# Altium PCB DE-260124.PcbDoc
Units mil, origin at the board's own origin, x right, y up, seen from the top; angles counter-clockwise.
Board outline 1771.65 x 2755.91 mil, 2 copper layers (Top Layer, Bottom Layer); 118 components, 96 nets, 356 pads, 98 vias.
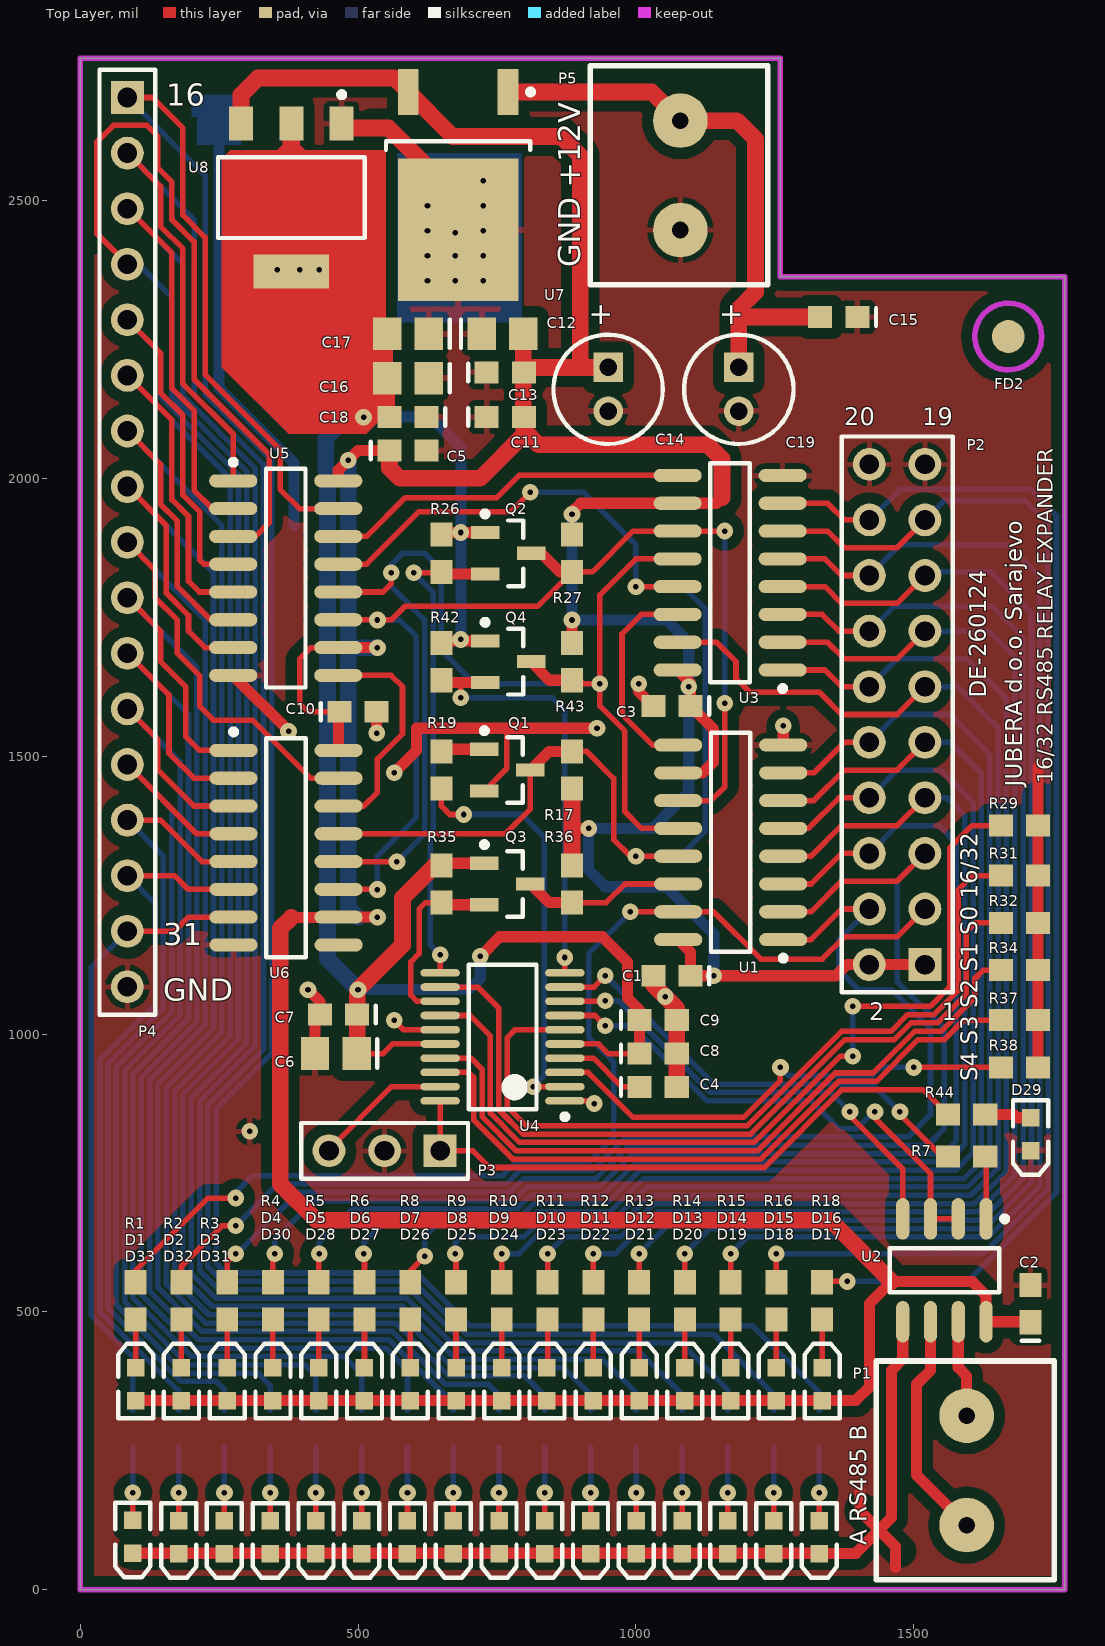
[diagram p0: Top Layer view]
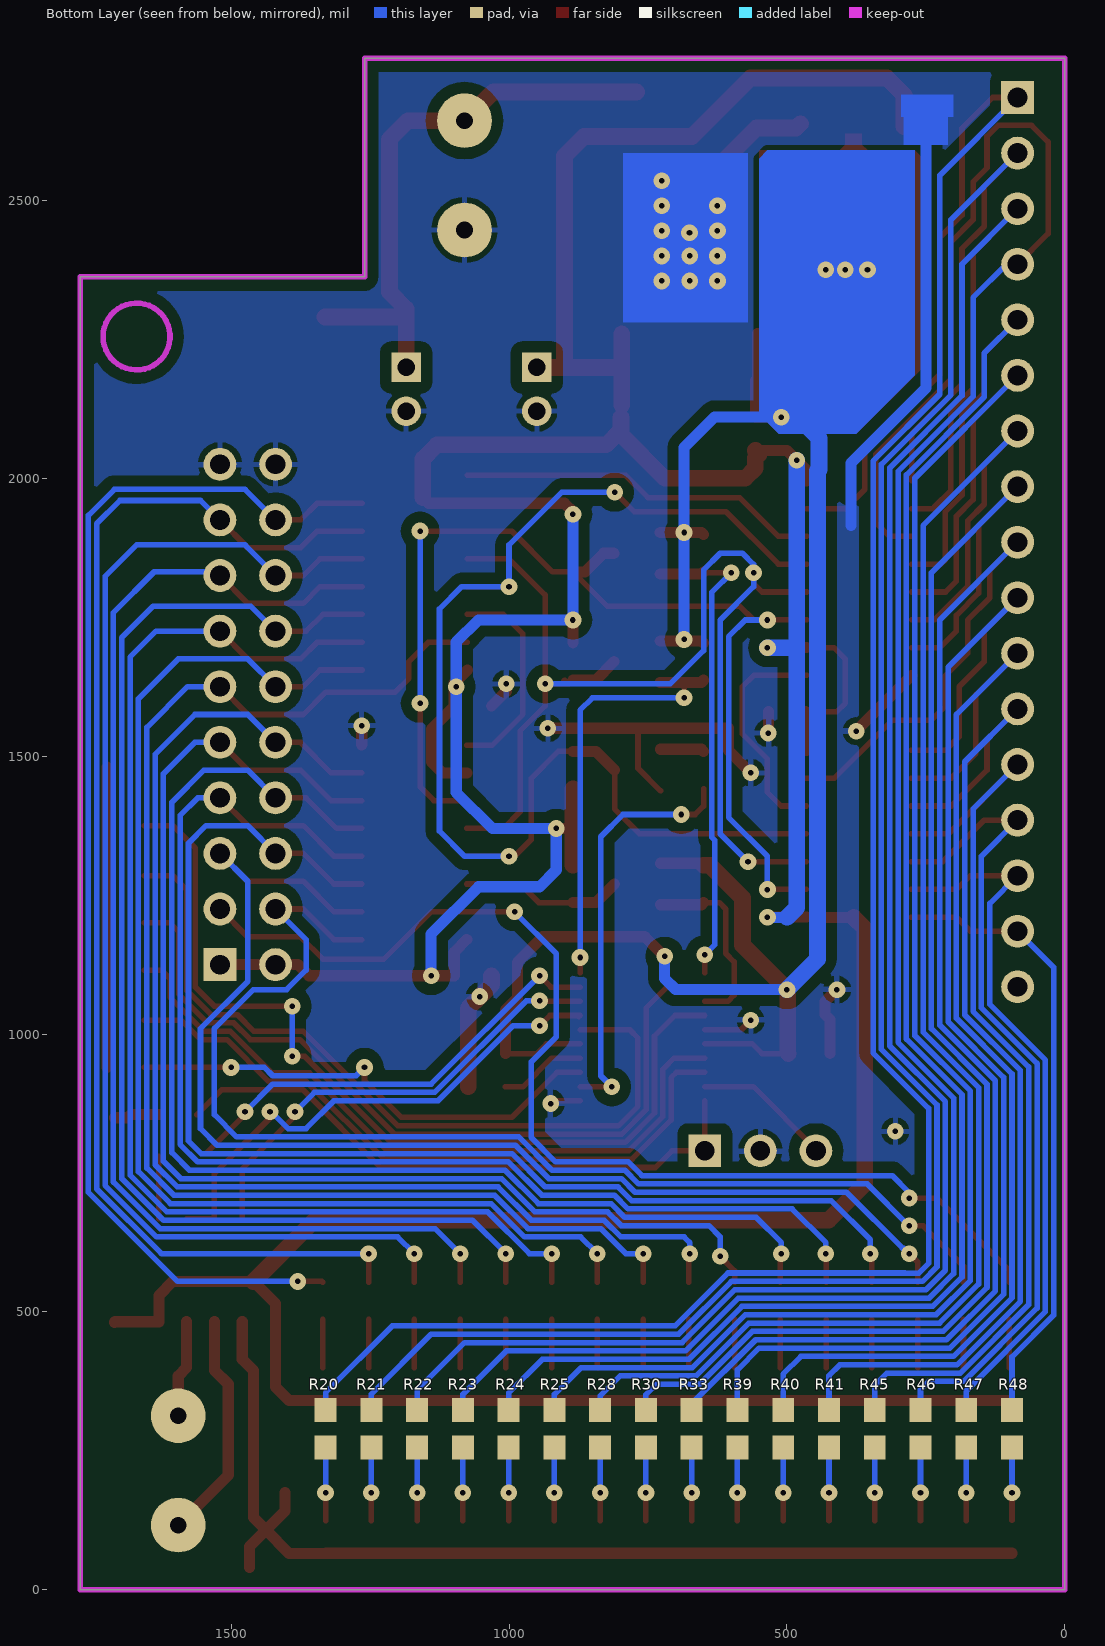
[diagram p1: Bottom Layer view, seen from below]

## Layer stack, top to bottom
Top Solder: solder mask 0.4, Solder Resist, Dk 3.5
Top Layer: signal copper 1.4
Dielectric 1: dielectric 12.6, FR-4, Dk 4.8
Bottom Layer: signal copper 1.4
Bottom Solder: solder mask 0.4, Solder Resist, Dk 3.5

## Board outline
0,0 0,2755.91 1259.84,2755.91 1259.84,2362.2 1771.65,2362.2 1771.65,0

## Design rules (kind name [scope] priority, off if disabled: settings)
Clearance [All] p1: gap=10 ignorepadtopadclearanceinfootprint=FALSE except(0: Arc-Hole Track-Hole SMDPad-Hole THPad-Hole Via-Hole Fill-Hole Poly-Hole Region-Hole Text-Hole; 5: Track-Track; 8: Arc-Track; 20: Arc-Poly Track-Poly SMDPad-Poly THPad-Poly Via-Poly Fill-Poly Poly-Poly)
PolygonConnect [All] p1: connectstyle=Relief reliefconductorwidth=10 reliefentries=4 polygonreliefangle="90 Angle" airgapwidth=10
RoutingVias [All] p1: holewidth=28 width=50 viastyle="Through Hole" minholewidth=10 minwidth=30 maxholewidth=28 maxwidth=50
SolderMaskExpansion [All] p1: expansion=4
Width [All] p1: maxlimit=157.48 minlimit=10 preferedwidth=30
30 further rules are at their usual default settings.

## Components (designator, comment, footprint, x,y, rotation, side; value= is the part's Value field where it differs from the comment)
C1 "100nF" 0603 1065,1105 r180 top
C2 "100nF" 0603 1710,515 r90 top
C3 "100nF" 0603 1065,1590 r180 top
C4 "100nF" 0603 1040,905 r0 top
C5 "100nF" 0603 590,2050 r0 top
C6 "4u7" 0805 460,965 r180 top
C7 "100nF" 0603 465,1035 r180 top
C8 "1uF" 0603 1040,965 r0 top
C9 "10nF" 0603 1040,1025 r0 top
C10 "100nF" 0603 500,1580 r0 top
C11 "100nF" 0603 765,2110 r0 top
C12 "10uF" 0805 760,2260 r0 top
C13 "100nF" 0603 765,2190 r0 top
C14 "22uF" CAPPR2-5X11 950,2160 r270 top value=47uF
C15 "100nF" 0603 1365,2290 r180 top
C16 "10uF" 0805 590,2180 r180 top
C17 "10uF" 0805 590,2260 r180 top
C18 "100nF" 0603 590,2110 r180 top
C19 "22uF" CAPPR2-5X11 1185,2160 r270 top value=47uF
D1 "LED_RED" 1.6X0.8X0.8 100,370 r90 top
D2 "LED_RED" 1.6X0.8X0.8 182.33,370 r90 top
D3 "LED_RED" 1.6X0.8X0.8 264.67,370 r90 top
D4 "LED_RED" 1.6X0.8X0.8 347,370 r90 top
D5 "LED_RED" 1.6X0.8X0.8 429.33,370 r90 top
D6 "LED_RED" 1.6X0.8X0.8 511.67,370 r90 top
D7 "LED_RED" 1.6X0.8X0.8 594,370 r90 top
D8 "LED_RED" 1.6X0.8X0.8 676.33,370 r90 top
D9 "LED_RED" 1.6X0.8X0.8 758.67,370 r90 top
D10 "LED_RED" 1.6X0.8X0.8 840,370 r90 top
D11 "LED_RED" 1.6X0.8X0.8 923.33,370 r90 top
D12 "LED_RED" 1.6X0.8X0.8 1005.67,370 r90 top
D13 "LED_RED" 1.6X0.8X0.8 1088,370 r90 top
D14 "LED_RED" 1.6X0.8X0.8 1170.33,370 r90 top
D15 "LED_RED" 1.6X0.8X0.8 1252.67,370 r90 top
D16 "LED_RED" 1.6X0.8X0.8 1335,370 r90 top
D17 "LED_RED" 1.6X0.8X0.8 1330,95 r270 top
D18 "LED_RED" 1.6X0.8X0.8 1247.67,95 r270 top
D19 "LED_RED" 1.6X0.8X0.8 1165.33,95 r270 top
D20 "LED_RED" 1.6X0.8X0.8 1083,95 r270 top
D21 "LED_RED" 1.6X0.8X0.8 1000.67,95 r270 top
D22 "LED_RED" 1.6X0.8X0.8 918.33,95 r270 top
D23 "LED_RED" 1.6X0.8X0.8 836,95 r270 top
D24 "LED_RED" 1.6X0.8X0.8 753.67,95 r270 top
D25 "LED_RED" 1.6X0.8X0.8 671.33,95 r270 top
D26 "LED_RED" 1.6X0.8X0.8 589,95 r270 top
D27 "LED_RED" 1.6X0.8X0.8 506.67,95 r270 top
D28 "LED_RED" 1.6X0.8X0.8 424.33,95 r270 top
D29 "LED_RED" 1.6X0.8X0.8 1710,820 r270 top
D30 "LED_RED" 1.6X0.8X0.8 342,95 r270 top
D31 "LED_RED" 1.6X0.8X0.8 259.67,95 r270 top
D32 "LED_RED" 1.6X0.8X0.8 177.33,95 r270 top
D33 "LED_RED" 1.6X0.8X0.8 95,95.47 r270 top
FD2 "Fiducial" Fiducial 1670,2255 r0 top
P1 "TERMINAL BLOK 2" "TERMINAL BLOK 2" 1595,215 r180 top
P2 "Header 10X2" HDR2X10 1520,1125 r90 top
P3 "ICSP" HDR1X3 647.8,790 r180 top
P4 "Header 17" HDR1X17 85,2685 r270 top
P5 "TERMINAL BLOK 2" "TERMINAL BLOK 2" 1080,2545 r180 top
Q1 "MMBT2222" SOT23_N 768.66,1475 r0 top
Q2 "BSS123" SOT23_N 770,1865 r0 top
Q3 "BSS123" SOT23_N 768.66,1270 r0 top
Q4 "BSS123" SOT23_N 770,1670 r0 top
R1 "3K3" ERA-0603 100,520 r90 top
R2 "3K3" ERA-0603 182.33,520 r90 top
R3 "3K3" ERA-0603 264.67,520 r90 top
R4 "3K3" ERA-0603 347,520 r90 top
R5 "3K3" ERA-0603 429.33,520 r90 top
R6 "3K3" ERA-0603 511.67,520 r90 top
R7 "1K" ERA-0603 1595,780 r0 top
R8 "3K3" ERA-0603 594,520 r90 top
R9 "3K3" ERA-0603 676.33,520 r90 top
R10 "3K3" ERA-0603 758.67,520 r90 top
R11 "3K3" ERA-0603 841,520 r90 top
R12 "3K3" ERA-0603 923.33,520 r90 top
R13 "3K3" ERA-0603 1005.67,520 r90 top
R14 "3K3" ERA-0603 1088,520 r90 top
R15 "3K3" ERA-0603 1170.33,520 r90 top
R16 "3K3" ERA-0603 1252.67,520 r90 top
R17 "10K" ERA-0603 885,1475 r90 top
R18 "3K3" ERA-0603 1335,520 r90 top
R19 "10K" ERA-0603 650,1475 r90 top
R20 "3K3" ERA-0603 1330,290 r270 bottom
R21 "3K3" ERA-0603 1247.67,290 r270 bottom
R22 "3K3" ERA-0603 1165.33,290 r270 bottom
R23 "3K3" ERA-0603 1083,290 r270 bottom
R24 "3K3" ERA-0603 1000.67,290 r270 bottom
R25 "3K3" ERA-0603 918.33,290 r270 bottom
R26 "10K" ERA-0603 650,1865 r270 top
R27 "10K" ERA-0603 885,1865 r270 top
R28 "3K3" ERA-0603 836,290 r270 bottom
R29 "NF" ERA-0603 1690,1375 r180 top
R30 "3K3" ERA-0603 753.67,290 r270 bottom
R31 "NF" ERA-0603 1690,1285 r180 top
R32 "NF" ERA-0603 1690,1200 r180 top
R33 "3K3" ERA-0603 671.33,290 r270 bottom
R34 "NF" ERA-0603 1690,1115 r180 top
R35 "10K" ERA-0603 650,1270 r270 top
R36 "10K" ERA-0603 885,1270 r270 top
R37 "NF" ERA-0603 1690,1025 r180 top
R38 "NF" ERA-0603 1690,940 r180 top
R39 "3K3" ERA-0603 589,290 r270 bottom
R40 "3K3" ERA-0603 506.67,290 r270 bottom
R41 "3K3" ERA-0603 424.33,290 r270 bottom
R42 "10K" ERA-0603 650,1670 r270 top
R43 "10K" ERA-0603 885,1670 r270 top
R44 "3K3" ERA-0603 1595,855 r0 top
R45 "3K3" ERA-0603 342,290 r270 bottom
R46 "3K3" ERA-0603 259.67,290 r270 bottom
R47 "3K3" ERA-0603 177.33,290 r270 bottom
R48 "3K3" ERA-0603 95,290 r270 bottom
U1 "SN74HC595D" D016_N 1170.51,1345 r180 top
U2 "MAX485" D008_L 1555,575 r270 top
U3 "SN74HC595D" D016_N 1169.49,1830 r180 top
U4 "STM32F030F4P6" STM-TSSOP20_N 760,995 r180 top
U5 "SN74HC595D" D016_N 370,1820.35 r0 top
U6 "SN74HC595D" D016_N 370.51,1335.35 r0 top
U7 "L78M05CDT-TR" TO-252_N 680.24,2527.68 r270 top
U8 "REG1117-3.3" ZZ311 380,2505 r180 top

## Footprints (in the part's own frame and the unit in brackets; to place one, negate y for a bottom-side part, rotate by r counter-clockwise, add the part's x,y. Pads: shape width x height; smd on the part's side, far side on the other; paste and mask are expansions set on the pad)
1.6X0.8X0.8 [mm] "SM LED; 2 Flat Leads"
  rect 0.8x0.8 smd: 1(-0.75,0) 2(0.75,0)
  silkscreen extent -1.55,-0.8 1.85,0.8
0603 [mm] "Chip Capacitor; Body 1.6 x 0.8 mm (LxW typ)"
  rect 1.1x1 smd: 1(-0.85,0) 2(0.85,0)
  silkscreen extent -1.7,-0.4 -1.7,0.4
0805 [mm] "Chip Capacitor; Body 2.0 x 1.2 mm (LxW typ)"
  rect 1.3x1.5 smd: 1(-0.95,0) 2(0.95,0)
  silkscreen extent -1.9,-0.65 -1.9,0.65
CAPPR2-5X11 [mm] "Capacitor, Electrolytic, Radial; Body 5 x 11 mm (Dia.xH typ); Pin Spacing 2 mm (typ)"
  rect 1.35x1.35 hole 0.8: 1(-1,0)
  round 1.35 hole 0.8: 2(1,0)
  silkscreen extent -2.5,-2.5 2.5,2.5
D008_L [mm] "SOIC, 8-Leads, Body 4.9x3.9mm, Pitch 1.27mm, IPC High Density"
  oval 1.9x0.6 smd: 1(-2.35,1.905) 2(-2.35,0.635) 3(-2.35,-0.635) 4(-2.35,-1.905) 5(2.35,-1.905) 6(2.35,-0.635) 7(2.35,0.635) 8(2.35,1.905)
  silkscreen extent -2.47,-2.5 1,2.88, body extent -2,-2.5 2,2.5, height 1.75
D016_N [mm] "SOIC, 16-Leads, Body 9.9x3.9mm, Pitch 1.27mm, IPC Medium Density"
  oval 2.2x0.6 smd: 1(-2.4,4.445) 2(-2.4,3.175) 3(-2.4,1.905) 4(-2.4,0.635) 5(-2.4,-0.635) 6(-2.4,-1.905) 7(-2.4,-3.175) 8(-2.4,-4.445) 9(2.4,-4.445) 10(2.4,-3.175) 11(2.4,-1.905) 12(2.4,-0.635) 13(2.4,0.635) 14(2.4,1.905) 15(2.4,3.175) 16(2.4,4.445)
  silkscreen extent -2.53,-5 0.9,5.42, body extent -1.95,-4.95 1.95,4.95, height 1.75
ERA-0603 [mm] "Chip Resistor; Body 1.6 x 0.8 mm (LxW typ)"
  rect 1.1x1 smd: 1(-0.85,0) 2(0.85,0)
Fiducial [mm] "Pick and place machine mark"
  round 1.5 smd paste+0 mask+0.8: 3(0,0)
  Keep-Out Layer circle w0.254: c0,0 r1.529
HDR1X3 [mm] "Connector; Header; 3 Position"
  rect 1.5x1.5 hole 0.9: 1(0,0)
  round 1.5 hole 0.9: 2(2.54,0) 3(5.08,0)
  silkscreen extent -1.27,-1.27 6.35,1.27
HDR1X17 [mm] "Connector; Header; 17 Position"
  rect 1.5x1.5 hole 0.9: 1(0,0)
  round 1.5 hole 0.9: 2(2.54,0) 3(5.08,0) 4(7.62,0) 5(10.16,0) 6(12.7,0) 7(15.24,0) 8(17.78,0) 9(20.32,0) 10(22.86,0) 11(25.4,0) 12(27.94,0) 13(30.48,0) 14(33.02,0) 15(35.56,0) 16(38.1,0) 17(40.64,0)
  silkscreen extent -1.27,-1.27 41.91,1.27
HDR2X10 [mm] "Connector; Header; 10x2 Position"
  rect 1.5x1.5 hole 0.9: 1(0,0)
  round 1.5 hole 0.9: 2(0,2.54) 3(2.54,0) 4(2.54,2.54) 5(5.08,0) 6(5.08,2.54) 7(7.62,0) 8(7.62,2.54) 9(10.16,0) 10(10.16,2.54) 11(12.7,0) 12(12.7,2.54) 13(15.24,0) 14(15.24,2.54) 15(17.78,0) 16(17.78,2.54) 17(20.32,0) 18(20.32,2.54) 19(22.86,0) 20(22.86,2.54)
  silkscreen extent -1.27,-1.27 24.13,3.81
SOT23_N [mm] "SOT23, 3-Leads, Body 2.9x1.3mm, Pitch 0.95mm, Lead Span 2.3mm, IPC Medium Density"
  rect 1.3x0.6 smd: 1(-1.05,0.95) 2(-1.05,-0.95) 3(1.05,0)
  silkscreen extent -1.17,-1.5 0.7,1.92, body extent -0.7,-1.5 0.7,1.5, height 1.1
STM-TSSOP20_N [mm] "SOP, 20-Leads, Body 6.6x4.5mm, Pitch 0.65mm, IPC Medium Density"
  oval 1.8x0.35 smd: 1(-2.85,2.925) 2(-2.85,2.275) 3(-2.85,1.625) 4(-2.85,0.975) 5(-2.85,0.325) 6(-2.85,-0.325) 7(-2.85,-0.975) 8(-2.85,-1.625) 9(-2.85,-2.275) 10(-2.85,-2.925) 11(2.85,-2.925) 12(2.85,-2.275) 13(2.85,-1.625) 14(2.85,-0.975) 15(2.85,-0.325) 16(2.85,0.325) 17(2.85,0.975) 18(2.85,1.625) 19(2.85,2.275) 20(2.85,2.925)
  silkscreen extent -2.98,-3.3 1.55,3.77, body extent -2.25,-3.3 2.25,3.3, height 1.2
"TERMINAL BLOK 2" [mm] "2 pinski terminal blok konektor"
  round 2.5 hole 0.762: 1(0,-2.5) 2(0,2.5)
  silkscreen extent -4,-5 4.13,5
TO-252_N [mm] "D-PAK, 4-Leads, Body 6.1x6.5mm, Pitch 2.28mm, Lead Span 9.7mm, IPC Medium Density"
  rect 2.1x0.95 smd: 1(-4.25,2.28) 3(-4.25,-2.28)
  rect 6.5x5.5 smd: 4(2.05,0)
  silkscreen extent -4.37,-3.3 -1.6,3.43, body extent -2,-3.3 4.2,3.3, height 2.4
ZZ311 [mm] "SOT-223/SC-73; 4 Leads; Body 6.7 x 7.3 mm, inc. leads (LxW max)"
  rect 1.1x1.55 smd: 1(-2.3,-3.375) 2(0,-3.375) 3(2.3,-3.375)
  rect 3.45x1.55 smd: 4(0,3.375)
  silkscreen extent -3.35,-4.82 3.35,1.85

## Part data
C1 C2 C3 C4 C5 C7 C8 C9 C10 C11 C13 C15 C18: library part C0603, "Ceramic Chip Capacitor - Standard", PackageDocument=Mar-2001, Code_IPC="1608 [0603]", Code_JEITA=0603, ComponentLink1Description="Manufacturer Link", ComponentLink1URL=http://www.kemet.com/, ComponentLink2Description=Datasheet, ComponentLink2URL=http://www.kemet.com/kemet/web/homepage/kechome.nsf/vapubfilesname/F3102TA.pdf/$file/F3102TA.pdf, DatasheetDocument=Mar-2001, LatestRevisionDate=19-Mar-2004, LatestRevisionNote="Silkscreen size reduced.", Note="Footprint corresponds to dimensions for bulk cassette packaging. This case size has tightened tolerances.", PackageReference=0603, Published=17-Jul-2002, Publisher="Altium Limited"
C6 C12 C16 C17: library part C0805, "Ceramic Chip Capacitor - Standard", PackageDocument=Mar-2001, Code_IPC=2012[0805], Code_JEITA=0805, ComponentLink1Description="Manufacturer Link", ComponentLink1URL=http://www.kemet.com/, ComponentLink2Description=Datasheet, ComponentLink2URL=http://www.kemet.com/kemet/web/homepage/kechome.nsf/vapubfilesname/F3102TA.pdf/$file/F3102TA.pdf, DatasheetDocument=Mar-2001, LatestRevisionDate=19-Mar-2004, LatestRevisionNote="Silkscreen size reduced.", Note="Footprint corresponds to dimensions for bulk cassette packaging. This case size has tightened tolerances.", PackageReference=0805, Published=17-Jul-2002, Publisher="Altium Limited"
C14 C19: library part EKA00AA247F00, "Aluminum Electrolytic Capacitor, Radial Style with Long Leads: 47uF, 35V", ComponentLink1Description="Manufacturer Link", ComponentLink1URL=http://www.vishay.com/, ComponentLink2Description=Datasheet, ComponentLink2URL=http://www.vishay.com/docs/25014/eka.pdf, DatasheetDocument=20-Feb-2001, DrillSize="Nominal, Rounded To The Nearest 0.1mm", Note="Refer to Manufacturer's Data Sheets for other lead formations", PackageReference=CAPPR2-5X11, Published=19-Mar-2004, Publisher="Altium Limited"
D1 D2 D3 D4 D5 D6 D7 D8 D9 D10 D11 D12 D13 D14 D15 D16 D17 D18 D19 D20 D21 D22 D23 D24 D25 D26 D27 D28 D29 D30 D31 D32 D33: library part HSMZ-C190, "High Performance Chip LED, Red", LED_Colour=Red, PackageDocument=11-Mar-2002, ComponentLink1Description="Manufacturer Link", ComponentLink1URL=http://www.agilent.com/, ComponentLink2Description=Datasheet, ComponentLink2URL=http://cp.literature.agilent.com/litweb/pdf/5988-5891EN.pdf, DatasheetDocument=11-Mar-2002, LuminousIntensity="40mcd (Minimum).", PackageReference=1.6X0.8X0.8, PCB_Layout="Complies with manufacturer's recommendation.", Published=11-Dec-2002, Publisher="Altium Limited"
FD2: library part Fiduchial, "Fiduchial mark"
P1 P5: "2 pinski terminal blok"
P2: "Header, 10-Pin, Dual row", LatestRevisionDate=17-Jul-2002, LatestRevisionNote="Re-released for DXP Platform.", Publisher="Altium Limited"
P3: library part "Header 3", "Header, 3-Pin", LatestRevisionDate=17-Jul-2002, LatestRevisionNote="Re-released for DXP Platform.", Publisher="Altium Limited"
P4: "Header, 17-Pin", LatestRevisionDate=17-Jul-2002, LatestRevisionNote="Re-released for DXP Platform.", Publisher="Altium Limited"
Q1: library part BC817, "NPN General-purpose Transistor", ComponentLink1Description="Manufacturer Link", ComponentLink1URL=http://www.semiconductors.philips.com/, ComponentLink2Description=Datasheet, ComponentLink2URL=http://www.semiconductors.philips.com/acrobat/datasheets/BC817_BC817W_BC337_5.pdf, DatasheetVersion=Jun-1999, LatestRevisionDate=12-Dec-2006, LatestRevisionNote="IPC-7351 Footprint Added.", PackageDescription="3-Pin SOT-23 Package 0.95 mm Pitch, 2.3 mm Lead Span", PackageReference=SOT23, PackageVersion=May-1999, Published=17-Sep-2003, Publisher="Altium Limited"
Q2 Q3 Q4: "N-channel Enhancement Mode Vertical D-MOSFET", ComponentLink1Description="Manufacturer Link", ComponentLink1URL=http://www.semiconductors.philips.com/, ComponentLink2Description=Datasheet, ComponentLink2URL=http://www.semiconductors.philips.com/acrobat/datasheets/BSS123_3.pdf, DatasheetVersion=Apr-1995, LatestRevisionDate=12-Dec-2006, LatestRevisionNote="IPC-7351 Footprint Added.", PackageDescription="3-Pin SOT-23 Package 0.95 mm Pitch, 2.3 mm Lead Span", PackageReference=SOT23, PackageVersion=May-1999, Published=17-Sep-2003, Publisher="Altium Limited"
R1 R2 R3 R4 R5 R6 R8 R9 R10 R11 R12 R13 R14 R15 R16 R18 R20 R21 R22 R23 R24 R25 R28 R30 R33 R39 R40 R41 R44 R45 R46 R47 R48: library part ERA3Y, "Rectangular Thick Film Chip Resistor, 10 Ohm to 330k Ohm Range, 0.1% and 0.5% Tolerance, 0603 Size, 0.063 W", PackageDocument=Mar-2003, Code_IPC="1608 [0603]", ComponentLink1Description="Manufacturer Link", ComponentLink1URL=http://www.panasonic.com/industrial/components/resistive_products.htm, ComponentLink2Description=Datasheet, ComponentLink2URL=http://www.panasonic.com/industrial/components/pdf/AOA0000CE8.pdf, LatestRevisionDate=19-Mar-2004, LatestRevisionNote="Silkscreen size reduced.", Note="If flow soldering, adjust pad width of PCB Footprint to 0.7 - 0.8 times the width of the resistor.", PackageReference=ERA-0603, Published=17-Dec-2003, Publisher="Altium Limited"
R7 R17 R19 R26 R27 R29 R31 R32 R34 R35 R36 R37 R38 R42 R43: library part ERA6Y, "Rectangular Thick Film Chip Resistor, 10 Ohm to 1M Ohm Range, 0.1% and 0.5% Tolerance, 0805 Size, 0.1 W", PackageDocument=Mar-2003, Code_IPC="2012 [0805]", ComponentLink1Description="Manufacturer Link", ComponentLink1URL=http://www.panasonic.com/industrial/components/resistive_products.htm, ComponentLink2Description=Datasheet, ComponentLink2URL=http://www.panasonic.com/industrial/components/pdf/AOA0000CE8.pdf, LatestRevisionDate=19-Mar-2004, LatestRevisionNote="Silkscreen size reduced.", Note="If flow soldering, adjust pad width of PCB Footprint to 0.7 - 0.8 times the width of the resistor.", PackageReference=ERA-0805, Published=17-Dec-2003, Publisher="Altium Limited"
U1 U3 U5 U6: "8-Bit Shift Register with 3-State Output Registers", Code_IPC=SOIC127P600-16, ComponentLink1Description="Manufacturer Link", ComponentLink1URL=http://www.ti.com/, ComponentLink2Description=Datasheet, ComponentLink2URL=http://www-s.ti.com/sc/ds/sn74hc595.pdf, DatasheetVersion=May-1997, LatestRevisionDate=13-Apr-2006, LatestRevisionNote="IPC-7351 Footprint Added.", PackageDescription="16-Pin Small Outline Integrated Circuit 1.27 mm Pitch", PackageReference=D016, PackageVersion=Jan-1998, Published=8-Jun-2000, Publisher="Altium Limited"
U2: library part SN75176BD, "Differential Bus Transceiver", Code_IPC=SOIC127P600-8, ComponentLink1Description="Manufacturer Link", ComponentLink1URL=http://www.ti.com/, ComponentLink2Description=Datasheet, ComponentLink2URL=http://www-s.ti.com/sc/ds/sn75176b.pdf, DatasheetVersion=Sep-1989, LatestRevisionDate=13-Apr-2006, LatestRevisionNote="IPC-7351 Footprint Added.", Note="Receiver Hysteresis of 50mV Typical", PackageDescription="8-Pin Small Outline Integrated Circuit 1.27 mm Pitch", PackageReference=D008, PackageVersion=Jan-1998, Published=15-May-2002, Publisher="Altium Limited"
U4: "ARM Cortex-M0 32-bit MCU, 16 KB Flash, 4 KB Internal RAM, 15 I/Os, 20-pin TSSOP, -40 to 85 degC, Tube", I/Os (High Current)=15, Operating Frequency(F) (Processor speed) (MHz)=48, Supplier Part Number 1=497-14044-5-ND, Supply Voltage(Vcc) min (V)=2.4, ComponentLink1Description="Manufacturer URL", ComponentLink1URL=http://www.st.com/web/en/home.html, ComponentLink2Description=Datasheet, ComponentLink2URL=http://www.st.com/st-web-ui/static/active/en/resource/technical/document/datasheet/DM00088500.pdf, ComponentLink3Description="Package Specification", ComponentLink3URL=http://www.st.com/st-web-ui/static/active/en/resource/technical/document/datasheet/DM00065136.pdf, Core="ARM Cortex-M0", DatasheetVersion="Rev. 1", FLASH Size (Prog) (kB)=16, Internal RAM Size (kB)=4, Mounting Technology="Surface Mount", PackageDescription="20-Pin Thin Shrink Small Outline Package, 6.5 x 4.4 mm Body, 0.65 mm Pitch", PackageReference=TSSOP20, PackageVersion="Rev. 1, 11/2012", Packing=Tube, PartNumber=STM32F030F4P6, Supplier 1=Digi-Key, Supplier 2=Newark, Supplier 3=Mouser, Supplier Part Number 2=06X3648, Supplier Part Number 3=511-STM32F030F4P6
U7: "Positive Voltage Regulator, 5V, 3-Pin DPAK, Tape and Reel", ComponentLink1Description="Manufacturer URL", ComponentLink1URL=http://www.st.com, ComponentLink2Description=Datasheet, ComponentLink2URL=http://www.st.com/internet/com/TECHNICAL_RESOURCES/TECHNICAL_LITERATURE/DATASHEET/CD00000447.pdf, DatasheetVersion=Nov-2010, PackageDescription="3-Pin Transistor Outline Package 2.28 mm Pitch, 9.7 mm Lead Span (DPAK)", PackageReference=TO-252, PackageVersion=2011, PartNumber=L78M05CDT-TR
U8: "800mA and 1A Low Dropout Positive Regulator 2.85V, 3.3V, 5V, and Adjustable", ComponentLink1Description="Manufacturer Link", ComponentLink1URL=http://www.ti.com/, ComponentLink2Description=Datasheet, ComponentLink2URL=http://www-s.ti.com/sc/ds/REG1117.pdf, DatasheetVersion=Sep-1997, LatestRevisionDate=17-Jul-2002, LatestRevisionNote="Re-released for DXP Platform.", PackageDescription="SOT-223/SC-73; 4 Leads; Body 6.7 x 7.3 mm, inc. leads (LxW max)", PackageReference=ZZ311, PackageVersion=revC, Published=8-Jun-2000, Publisher="Altium Limited"

## Via types
v1: diameter 30, hole 10, Top Layer to Bottom Layer, 98 vias

## Nets (pads, with @x,y where several pads share a name; then routed paths per layer and width w, separated by ;. In a path a pad name is that pad's centre, name@x,y a point inside that pad or via, vN(x,y) a via of type N, cw(c..) or ccw(c..) an arc to the next point about the centre after c; other vN are vias at no path point)
+3V3: C6.1 C7.1 C8.1 C9.1 C16.2 C17.2 C18.2 Q2.1 Q3.1 Q4.1 R26.1 R35.1 R42.1 U4.5 U4.16 U8.2 U8.4 | length 3527.8
  Top Layer w10: C6.1 545,965 562.2,982.2 U4.16 ; U4.5 932.8,982.2 950,965 C8.1
  Top Layer w20: v1(510,2110) C18.2 556.54,2176.06 C16.2 C17.2 ; R35.1 653.94,1307.4 Q3.1 ; R42.1 653.94,1707.4 Q4.1 ; R26.1 653.94,1902.4 v1(685,1902.4) Q2.1 ; v1(720,1140) 755,1175 940,1175 985,1130 985,1065 1006.54,1043.46 C9.1 C8.1
  Top Layer w30: C6.1 498.46,966.06 C7.1 498.46,1078.46 v1(500,1080) 580,1160 580,1245 638.46,1303.46 R35.1
  Bottom Layer w20: v1(500,1080) 700,1080 720,1100 v1(720,1140) ; v1(510,2110) 630,2110 685,2055 v1(685,1902.4) v1(685,1710)
  Bottom Layer w30: v1(500,1080) 445,1135 445,2012.92 442.24,2015.68 442.24,2072.24 480,2110 v1(510,2110)
  other v1: 355,2375 395,2375 430,2375
+5V: C1.1 C2.1 C3.1 C5.1 C10.1 C11.2 C12.2 C13.2 C14.1 D1.1 D2.1 D3.1 D4.1 D5.1 D6.1 D7.1 D8.1 D9.1 D10.1 D11.1 D12.1 D13.1 D14.1 D15.1 D16.1 P2.1 P2.2 R17.1 R27.1 R36.1 R43.1 U1.10 U1.16 U2.8 U3.10 U3.16 U5.10 U5.16 U6.10 U6.16 U7.3 U8.3 | length 9845.8
  Top Layer w10: U5.10 415.35,1695.35 395,1675 395,1595 410,1580 C10.1 ; v1@534.65,1695.35 v1(535,1695)
  Top Layer w20: D1.1 D2.1 D3.1 D4.1 D5.1 D6.1 D7.1 D8.1 D9.1 D10.1 D11.1 D12.1 D13.1 D14.1 D15.1 D16.1 1395.47,340.47 1420,365 1420,515 1460,555 1605,555 1630,530 U2.8 1709.06,482.48 C2.1 ; 380,1210 U6.10@450,1210 ; U5.10 v1@534.65,1695.35 ; U5.16 464.49,2014.49 v1(482.24,2032.24) 500,2050 C5.1 ; U6.10 534.65,1210.35 v1(535,1210) ; U6.16 465,1578.46 C10.1 ; C13.2 C13.2@807.83,2199.37 ; 885,1370 v1(915,1370) ; R43.1 v1(885,1745) ; v1(885,1935) 885,1940 900,1955 U3.10 1145,1955 1155,1965 ; U3.16 1098.46,1631.54 C3.1 1139.33,1549.13 1139.33,1489.33 1120,1470 U1.10 ; U1.16 1098.46,1147.56 C1.1 v1(1140,1105) 1360,1105 1380,1125 P2.2 P2.1
  Top Layer w30: U8.3@289.45,2632.87 U8.3 289.45,2689.45 320,2720 565.47,2720 U7.3 670.47,2615 865,2615 900,2580 900,2199.37 ; 380,1210 360,1190 360,730 425,665 1350,665 1460,555 ; C5.1 550,2043.46 556.73,2036.73 556.73,2018.27 575,2000 720,2000 798.46,2078.46 798.46,2086.54 ; 797.4,2131.06 C12.2 ; C11.2 798.46,2086.54 ; C13.2@807.83,2199.37 900,2199.37 ; R36.1 885,1370 R17.1 ; C14.1 900,2199.37 ; 1155,1965 1155,2035 1130,2060 825,2060 798.46,2086.54
  Bottom Layer w20: 500,1210 v1(535,1210) ; v1(885,1935) v1(885,1745) 1055,1745 1095,1705 v1(1095,1625) 1095,1435 1030,1370 v1(915,1370) 915,1295 945,1265 1055,1265 1140,1180 v1(1140,1105)
  Bottom Layer w30: v1(482.24,2032.24) 482.24,1695 ; 500,1210 482.24,1227.76 482.24,1695 ; v1(535,1695) 482.24,1695
HC595_DS: Q3.3 R36.2 U1.14 | length 293.7
  Top Layer w10: R36.2 946.54,1236.54 980,1270 U1.14
  Top Layer w20: Q3.3 843.46,1236.54 R36.2
HC595_OE: Q1.3 R17.2 U1.13 U3.13 U5.13 U6.13 | length 2314.7
  Top Layer w10: U5.13 515.35,1845.35 610,1940 775,1940 v1(810,1975) ; U6.13 765.35,1360.35 810,1405 Q1.3 ; R17.2 911.54,1508.46 960,1460 960,1350 990,1320 v1(1000,1320) U1.13 ; v1(1000,1805) U3.13
  Top Layer w20: Q1.3 843.46,1508.46 R17.2
  Bottom Layer w10: v1(810,1975) 905,1975 1000,1880 v1(1000,1805) 1085,1805 1125,1765 1125,1365 1080,1320 v1@1005,1320
HC595_SH: Q2.3 R27.2 U1.11 U3.11 U5.11 U6.11 | length 2035.3
  Top Layer w10: U5.11 560.35,1745.35 585,1770 823.46,1770 R27.2 921.54,1831.54 995,1905 U3.11 v1(1160,1905) ; U6.11 v1@530.35,1260.35 ; U1.11 1135,1420 1160,1445 v1(1160,1595)
  Top Layer w20: Q2.3 830,1865 863.46,1831.54 R27.2
  Bottom Layer w10: v1(535,1260) 535,1320 605,1390 605,1715 575,1745 v1(535,1745) ; v1(1160,1595) v1(1160,1905)
HC595_ST: Q4.3 R43.2 U1.12 U3.12 U5.12 U6.12 | length 2193.9
  Top Layer w10: U5.12 544.65,1795.35 560,1810.71 v1(560,1830) ; U6.12 569.65,1310.35 v1(570,1310) ; R43.2 891.54,1630 v1(935,1630) ; R43.2@900,1636.54 R43.2@901.54,1635 ; U3.12 1000,1855 935,1790 v1(935,1630) ; U1.12 1010,1370 980,1400 980,1545 935,1590 v1(935,1630)
  Top Layer w20: Q4.3 844.8,1636.54 R43.2
  Bottom Layer w10: v1(560,1830) 560,1805 620,1745 620,1360 v1(570,1310) ; v1@560,1835 560,1845 580,1865 620,1865 650,1835 650,1690 710,1630 v1(935,1630)
NetC4_1: C4.1 U4.4 | length 155.7
  Top Layer w10: U4.4 923.39,956.61 975,905 C4.1
NetC15_2: C15.2 C19.1 P5.1 U7.1 | length 1056
  Top Layer w30: U7.1 1028.43,2695 P5.1 1181.57,2643.43 1215,2610 1215,2335 1185,2305 ; C19.1 1185,2305 ; C15.2 1200,2290 1185,2305
NetD1_2: D1.2 R1.1 | length 87
  Top Layer w10: D1.2 R1.1
NetD2_2: D2.2 R2.1 | length 87
  Top Layer w10: D2.2 R2.1
NetD3_2: D3.2 R3.1 | length 87
  Top Layer w10: D3.2 R3.1
NetD4_2: D4.2 R4.1 | length 87
  Top Layer w10: D4.2 R4.1
NetD5_2: D5.2 R5.1 | length 87
  Top Layer w10: D5.2 R5.1
NetD6_2: D6.2 R6.1 | length 87
  Top Layer w10: D6.2 R6.1
NetD7_2: D7.2 R8.1 | length 87
  Top Layer w10: D7.2 R8.1
NetD8_2: D8.2 R9.1 | length 87
  Top Layer w10: D8.2 R9.1
NetD9_2: D9.2 R10.1 | length 87
  Top Layer w10: D9.2 R10.1
NetD10_2: D10.2 R11.1 | length 87.4
  Top Layer w10: D10.2 841,400.53 R11.1
NetD11_2: D11.2 R12.1 | length 87
  Top Layer w10: D11.2 R12.1
NetD12_2: D12.2 R13.1 | length 87
  Top Layer w10: D12.2 R13.1
NetD13_2: D13.2 R14.1 | length 87
  Top Layer w10: D13.2 R14.1
NetD14_2: D14.2 R15.1 | length 87
  Top Layer w10: D14.2 R15.1
NetD15_2: D15.2 R16.1 | length 87
  Top Layer w10: D15.2 R16.1
NetD16_2: D16.2 R18.1 | length 87
  Top Layer w10: D16.2 R18.1
NetD17_1: D17.1 R20.2 | length 132
  Top Layer w10: D17.1 v1(1330,175)
  Bottom Layer w10: v1(1330,175) R20.2
NetD18_1: D18.1 R21.2 | length 132
  Top Layer w10: D18.1 v1(1247.67,175)
  Bottom Layer w10: v1(1247.67,175) R21.2
NetD19_1: D19.1 R22.2 | length 132
  Top Layer w10: D19.1 v1(1165.33,175)
  Bottom Layer w10: v1(1165.33,175) R22.2
NetD20_1: D20.1 R23.2 | length 132
  Top Layer w10: D20.1 v1(1083,175)
  Bottom Layer w10: v1(1083,175) R23.2
NetD21_1: D21.1 R24.2 | length 132
  Top Layer w10: D21.1 v1(1000.67,175)
  Bottom Layer w10: v1(1000.67,175) R24.2
NetD22_1: D22.1 R25.2 | length 132
  Top Layer w10: D22.1 v1(918.33,175)
  Bottom Layer w10: v1(918.33,175) R25.2
NetD23_1: D23.1 R28.2 | length 132
  Top Layer w10: D23.1 v1(836,175)
  Bottom Layer w10: v1(836,175) R28.2
NetD24_1: D24.1 R30.2 | length 132
  Top Layer w10: D24.1 v1(753.67,175)
  Bottom Layer w10: v1(753.67,175) R30.2
NetD25_1: D25.1 R33.2 | length 132
  Top Layer w10: D25.1 v1(671.33,175)
  Bottom Layer w10: v1(671.33,175) R33.2
NetD26_1: D26.1 R39.2 | length 132
  Top Layer w10: D26.1 v1(589,175)
  Bottom Layer w10: v1(589,175) R39.2
NetD27_1: D27.1 R40.2 | length 132
  Top Layer w10: D27.1 v1(506.67,175)
  Bottom Layer w10: v1(506.67,175) R40.2
NetD28_1: D28.1 R41.2 | length 132
  Top Layer w10: D28.1 v1(424.33,175)
  Bottom Layer w10: v1(424.33,175) R41.2
NetD29_1: D29.1 R44.2 | length 83.8
  Top Layer w20: R44.2 1680,855 1685.47,849.53 D29.1
NetD30_1: D30.1 R45.2 | length 132
  Top Layer w10: D30.1 v1(342,175)
  Bottom Layer w10: v1(342,175) R45.2
NetD31_1: D31.1 R46.2 | length 132
  Top Layer w10: D31.1 v1(259.67,175)
  Bottom Layer w10: v1(259.67,175) R46.2
NetD32_1: D32.1 R47.2 | length 132
  Top Layer w10: D32.1 v1(177.33,175)
  Bottom Layer w10: v1(177.33,175) R47.2
NetD33_1: D33.1 R48.2 | length 131.5
  Top Layer w10: D33.1 v1(95,175)
  Bottom Layer w10: v1(95,175) R48.2
NetP1_1: P1.1 U2.7 | length 175.3
  Top Layer w20: U2.7 1580,400 1595,385 P1.1
NetP1_2: P1.2 U2.6 | length 413.5
  Top Layer w20: U2.6 1530,395 1505,370 1505,206.57 P1.2
NetQ1_1: Q1.1 R19.2 | length 79
  Top Layer w20: R19.2 653.94,1512.4 Q1.1
NetR7_2: R7.2 U2.1 | length 112.5
  Top Layer w10: U2.1 R7.2@1630,780
NetR19_1: R19.1 U4.2 | length 755
  Top Layer w10: R19.1 650,1410 665,1395 v1(690,1395) ; v1(815,905) 815.43,905.43 U4.2
  Bottom Layer w10: v1(690,1395) 795,1395 835,1355 835,925 v1(815,905)
NetU1_9: U1.9 U3.14 | length 383.3
  Top Layer w10: U3.14 1010,1755 975,1720 975,1575 1030,1520 U1.9
NetU3_9: U3.9 U5.14 | length 655.9
  Top Layer w10: U5.14 515.35,1895.35 585,1965 750,1965 790,2005 U3.9
NetU5_9: U5.9 U6.14 | length 412.8
  Top Layer w10: U5.9 559.65,1645.35 580,1625 580,1540 535,1495 535,1435 510.35,1410.35 U6.14
REL0: P2.3 R1.2 U1.15 | length 2044.6
  Top Layer w10: R1.2 100,575 230,705 v1(280,705) ; v1(990,1220) U1.15 1140,1220 1225,1135 1335,1135 1375,1175 1470,1175 P2.3
  Bottom Layer w10: v1(280,705) 280,715 310.47,745.47 760.77,745.47 785.29,770 916.11,770 960,813.89 960,950 915,995 915,1145 v1(990,1220)
REL1: P2.4 R2.2 U1.1 | length 2163.5
  Top Layer w10: R2.2 182.33,582.33 255,655 v1(280,655) ; U1.1 1315,1170 1370,1225 P2.4
  Bottom Layer w10: v1(280,655) 355.47,730.47 766.98,730.47 791.51,755 922.32,755 982.32,815 1490,815 1530,855 1530,1010 1460,1080 1400,1080 1365,1115 1365,1170 P2.4
REL2: P2.5 R3.2 U1.2 | length 2275.5
  Top Layer w10: R3.2 264.67,589.67 v1(280,605) ; U1.2 1315,1220 1370,1275 1470,1275 P2.5
  Bottom Layer w10: v1(280,605) 290,615 292.43,615 392.9,715.47 773.19,715.47 797.72,740 928.53,740 988.53,800 1525,800 1555,830 1555,1009.73 1470,1094.73 1470,1275 P2.5
REL3: P2.6 R4.2 U1.3 | length 2281.8
  Top Layer w10: R4.2 347,602 v1(350,605) ; U1.3 1315,1270 1370,1325 P2.6
  Bottom Layer w10: v1(350,605) 350,630 420.47,700.47 779.41,700.47 803.93,725 934.75,725 994.75,785 1553.79,785 1576.65,807.87 1576.65,1343.35 1545,1375 1470,1375 P2.6
REL4: P2.7 R5.2 U1.4 | length 2281.6
  Top Layer w10: R5.2 429.33,604.33 v1(430,605) ; U1.4 1315,1320 1370,1375 1470,1375 P2.7
  Bottom Layer w10: v1(430,605) 430,625 490.47,685.47 785.62,685.47 810.15,710 940.96,710 1000.96,770 1560,770 1591.65,801.65 1591.65,1393.35 1560,1425 P2.7
REL5: P2.8 R6.2 U1.5 | length 2275.4
  Top Layer w10: v1(510,605) 511.67,603.33 R6.2 ; U1.5 1310,1370 1365,1425 P2.8
  Bottom Layer w10: v1(510,605) 510,625 555.47,670.47 791.83,670.47 816.36,695 947.17,695 1007.17,755 1575,755 1606.65,786.65 1606.65,1417.13 1548.79,1475 1470,1475 P2.8
REL6: P2.9 R8.2 U1.6 | length 2271.2
  Top Layer w10: R8.2 594,574 v1(620,600) ; U1.6 1320,1420 1375,1475 1470,1475 P2.9
  Bottom Layer w10: v1(620,600) 620,635 640.47,655.47 798.05,655.47 822.57,680 953.39,680 1013.39,740 1590.5,740 1621.65,771.15 1621.65,1468.35 1565,1525 P2.9
REL7: P2.10 R9.2 U1.7 | length 2274.9
  Top Layer w10: v1(675,605) 676.33,603.67 R9.2 ; U1.7 1320,1470 1375,1525 P2.10
  Bottom Layer w10: v1(675,605) 675,625 685,635 798.79,635 828.79,665 959.6,665 1019.6,725 1596.72,725 1636.65,764.94 1636.65,1503.35 1565,1575 1470,1575 P2.10
REL8: P2.11 R10.2 U3.15 | length 2500.4
  Top Layer w10: R10.2 v1(758.67,605) ; U3.15 1145,1705 1180,1670 1180,1640 1205,1615 1330,1615 1370,1575 1470,1575 P2.11
  Bottom Layer w10: v1(758.67,605) 790,605 835,650 965.81,650 1025.81,710 1602.93,710 1651.65,758.72 1651.65,1551.78 1578.43,1625 P2.11
REL9: P2.12 R11.2 U3.1 | length 2254.6
  Top Layer w10: R11.2 v1(841,605) ; U3.1 1340,1655 1370,1625 P2.12
  Bottom Layer w10: v1(841,605) 871,635 972.03,635 1032.03,695 1609.14,695 1666.65,752.51 1666.65,1603.35 1595,1675 1470,1675 P2.12
REL10: P2.13 R12.2 U3.2 | length 2270.6
  Top Layer w10: R12.2 v1(923.33,605) ; U3.2 1345,1705 1375,1675 1470,1675 P2.13
  Bottom Layer w10: v1(923.33,605) 963.24,605 1038.24,680 1615.36,680 1681.65,746.3 1681.65,1678.35 1635,1725 P2.13
REL11: P2.14 R13.2 U3.3 | length 2258.9
  Top Layer w10: R13.2 v1(1005.67,605) ; U3.3 1335,1755 1365,1725 P2.14
  Bottom Layer w10: v1(1005.67,605) 1065.67,665 1621.57,665 1696.65,740.09 1696.65,1713.35 1640,1770 1465,1770 P2.14
REL12: P2.15 R14.2 U3.4 | length 2267
  Top Layer w10: R14.2 v1(1088,605) ; U3.4 1340,1805 1370,1775 1470,1775 P2.15
  Bottom Layer w10: v1(1088,605) 1133,650 1627.78,650 1711.65,733.87 1711.65,1758.35 1638.28,1831.72 1526.72,1831.72 P2.15
REL13: P2.16 R15.2 U3.5 | length 2275.7
  Top Layer w10: R15.2 v1(1170.33,605) ; U3.5 1340,1855 1370,1825 P2.16
  Bottom Layer w10: v1(1170.33,605) 1200.33,635 1633.99,635 1726.65,727.66 1726.65,1823.35 1670,1880 1475,1880 P2.16
REL14: P2.17 R16.2 U3.6 | length 2328.2
  Top Layer w10: R16.2 v1(1252.67,605) ; U3.6 1345,1905 1375,1875 1470,1875 P2.17
  Bottom Layer w10: v1(1252.67,605) 1625.21,605 1741.65,721.45 1741.65,1918.35 1700,1960 1555,1960 P2.17
REL15: P2.18 R18.2 U3.7 | length 2254
  Top Layer w10: U3.7 1345,1955 1375,1925 P2.18 ; R18.2 1336.53,555 v1(1380,555)
  Bottom Layer w10: v1(1380,555) 1596.42,555 1756.65,715.23 1756.65,1933.35 1710,1980 1475,1980 P2.18
REL16: P4.1 R20.1 U5.15 | length 4423.6
  Top Layer w10: P4.1 130,2685 185,2630 185,2473.28 225,2433.28 225,2186.42 360,2051.42 360,1980 394.65,1945.35 U5.15
  Bottom Layer w10: P4.1 225,2545 225,2151.07 345,2031.07 345,966.3 245,866.3 245,587.57 262.57,570 287.43,570 287.54,570.12 605.95,570.12 701.07,475 1210,475 1330,355 R20.1
REL17: P4.2 R21.1 U5.1 | length 3956.6
  Top Layer w10: P4.2 145,2525 145,2453.28 185,2413.28 185,2169.85 275.51,2079.34 U5.1
  Bottom Layer w10: P4.2 205,2465 205,2149.85 330,2024.85 330,972.51 230,872.51 230,581.36 256.36,555 293.64,555 293.76,555.12 599.73,555.12 694.85,460 1140,460 1247.67,352.33 R21.1
REL18: P4.3 R22.1 U5.2 | length 3764.7
  Top Layer w10: P4.3 165,2405 165,2161.57 205,2121.57 205,1978.14 235,1948.14 235,1945.35 U5.2
  Bottom Layer w10: P4.3 185,2385 185,2148.64 315,2018.64 315,978.73 215,878.73 215,575.15 250.15,540 299.85,540 299.97,540.12 593.52,540.12 688.64,445 1080,445 1165.33,359.67 R22.1
REL19: P4.4 R23.1 U5.3 | length 4185.8
  Top Layer w10: P4.4 30,2440 30,2605 60,2635 120,2635 140,2615 140,2558.28 165,2533.28 165,2465 205,2425 205,2178.14 340,2043.14 340,1920 315.35,1895.35 U5.3
  Bottom Layer w10: P4.4 105,2385 165,2325 165,2147.43 300,2012.43 300,984.94 200,884.94 200,568.93 243.93,525 306.07,525 306.18,525.12 587.31,525.12 682.43,430 1005,430 1083,352 R23.1
REL20: P4.5 R24.1 U5.4 | length 3328.9
  Top Layer w10: P4.5 145,2225 145,2153.28 185,2113.28 185,1969.85 215,1939.85 215,1853.28 222.93,1845.35 U5.4
  Bottom Layer w10: P4.5 145,2225 145,2146.21 285,2006.21 285,991.15 185,891.15 185,562.72 237.72,510 312.28,510 312.4,510.12 581.1,510.12 676.21,415 940,415 1000.67,354.33 R24.1
REL21: P4.6 R25.1 U5.5 | length 3112.2
  Top Layer w10: P4.6 165,2105 165,1961.57 195,1931.57 195,1815 214.65,1795.35 U5.5
  Bottom Layer w10: P4.6 270,2000 270,997.37 170,897.37 170,556.51 231.51,495 318.49,495 318.61,495.12 574.88,495.12 670,400 870,400 918.33,351.67 R25.1
REL22: P4.7 R28.1 U5.6 | length 2879.1
  Top Layer w10: P4.7 145,2025 145,1953.28 175,1923.28 175,1805 234.65,1745.35 U5.6
  Bottom Layer w10: P4.7 255,1915 255,1003.58 155,903.58 155,550.29 225.29,480 324.71,480 324.82,480.12 568.52,480.12 663.64,385 800,385 836,349 R28.1
REL23: P4.8 R30.1 U5.7 | length 2666.4
  Top Layer w10: P4.8 155,1915 155,1793.28 195,1753.28 195,1725 224.65,1695.35 U5.7
  Bottom Layer w10: P4.8 240,1830 240,1009.79 140,909.79 140,544.08 219.08,465 330.92,465 331.04,465.12 562.31,465.12 657.43,370 735,370 753.67,351.33 R30.1
REL24: P4.9 R33.1 U6.15 | length 2741
  Top Layer w10: P4.9 135,1835 135,1785 175,1745 175,1685 215,1645 215,1590 240,1565 310,1565 414.65,1460.35 U6.15
  Bottom Layer w10: P4.9 225,1745 225,1016.01 125,916.01 125,537.87 212.87,450 337.13,450 337.25,450.12 556.1,450.12 671.33,334.88 R33.1
REL25: P4.10 R39.1 U6.1 | length 2344
  Top Layer w10: P4.10 145,1725 145,1670 190,1625 190,1535 214.65,1510.35 U6.1
  Bottom Layer w10: P4.10 210,1660 210,1022.22 110,922.22 110,531.65 206.65,435 550,435 589,396 R39.1
REL26: P4.11 R40.1 U6.2 | length 2125.5
  Top Layer w10: P4.11 160,1610 160,1505 204.65,1460.35 U6.2
  Bottom Layer w10: P4.11 195,1575 195,1028.43 95,928.43 95,525.44 200.44,420 475,420 506.67,388.33 R40.1
REL27: P4.12 R41.1 U6.3 | length 1904
  Top Layer w10: P4.12 140,1530 140,1475 204.65,1410.35 U6.3
  Bottom Layer w10: P4.12 180,1490 180,1034.64 80,934.64 80,519.23 194.23,405 405,405 424.33,385.67 R41.1
REL28: P4.13 R45.1 U6.4 | length 1670.8
  Top Layer w10: P4.13 209.65,1360.35 U6.4
  Bottom Layer w10: P4.13 165,1405 165,1040.86 65,940.86 65,513.02 188.02,390 320,390 342,368 R45.1
REL29: P4.14 R46.1 U6.5 | length 1475.7
  Top Layer w10: P4.14 145,1385 219.65,1310.35 U6.5
  Bottom Layer w10: P4.14 150,1320 150,1047.07 50,947.07 50,506.8 181.8,375 245,375 259.67,360.33 R46.1
REL30: P4.15 R47.1 U6.6 | length 1284.2
  Top Layer w10: P4.15 170,1285 194.65,1260.35 U6.6
  Bottom Layer w10: P4.15 135,1235 135,1053.28 35,953.28 35,500.59 175.59,360 176.21,360 177.33,358.88 R47.1
REL31: P4.16 R48.1 U6.7 | length 1121.1
  Top Layer w10: P4.16 170,1185 195.35,1210.35 U6.7
  Bottom Layer w10: P4.16 20,1120 20,494.38 95,419.38 R48.1
SELECT_0: R31.2 U4.6 | length 1428.6
  Top Layer w10: U4.6 782.8,1007.8 768.23,993.23 768.23,870.06 803.28,835 1200,835 1370,1005 1458.93,1005 1488.93,1035 1536.21,1035 1579.53,1078.31 1579.53,1259.53 1605,1285 R31.2
SELECT_1: R32.2 U4.12 | length 1448.7
  Top Layer w10: U4.12 715.43,1084.57 753.23,1046.77 753.23,863.84 797.07,820 1206.21,820 1376.21,990 1465.15,990 1495.15,1020 1542.43,1020 1594.53,1072.1 1594.53,1184.53 1610,1200 R32.2
SELECT_2: R34.2 U4.17 | length 1282.1
  Top Layer w10: U4.17 703.39,956.61 723.23,936.77 723.23,851.42 784.64,790 1218.64,790 1358.64,930 1426.36,930 1501.36,1005 1548.64,1005 1609.53,1065.89 1609.53,1099.53 1625,1115 R34.2
SELECT_3: R37.2 U4.18 | length 1221.8
  Top Layer w10: U4.18 698.98,931.02 708.23,921.77 708.23,845.2 778.43,775 1224.85,775 1364.85,915 1432.57,915 1507.57,990 1554.85,990 1589.85,1025 R37.2
SELECT_4: R38.2 U4.3 | length 881.5
  Top Layer w10: U4.3 913.98,931.02 995,850 1193.79,850 1260,916.21 v1(1260,940) ; v1(1500,940) R38.2
  Bottom Layer w10: v1(1260,940) 1275,925 1425,925 1440,940 v1(1500,940)
SELECT_16_32: R29.2 U4.14 | length 1620.1
  Top Layer w10: U4.14 701.61,1033.39 738.23,996.77 738.23,857.63 790.86,805 1212.43,805 1367.43,960 v1(1390,960) ; v1(1390,1050) 1530,1050 1564.53,1084.53 1564.53,1334.53 1605,1375 R29.2
  Bottom Layer w10: v1(1390,960) v1(1390,1050)
SPI1_CSN: Q4.2 R42.2 U4.10 | length 776.9
  Top Layer w10: v1(685,1605) 685,1632.6 ; U4.10 v1(872.2,1137.8)
  Top Layer w20: R42.2 653.94,1632.6 685,1632.6 Q4.2
  Bottom Layer w10: v1(685,1605) 850,1605 872.2,1582.8 v1(872.2,1137.8)
SPI1_MOSI: Q3.2 R35.2 U4.13 | length 342.3
  Top Layer w10: U4.13 606.02,1058.98 595,1070 595,1130 610,1145 610,1225 621.54,1236.54 R35.2
  Top Layer w20: R35.2 653.94,1232.6 Q3.2
SPI1_SCK: Q2.2 R26.2 U4.11 | length 874.7
  Top Layer w10: v1(600,1830) 648.46,1830 R26.2 ; U4.11 v1(647.8,1142.8)
  Top Layer w20: R26.2 653.94,1827.6 Q2.2
  Bottom Layer w10: v1(600,1830) 635,1795 635,1353.79 630,1348.79 630,1160.59 v1(647.8,1142.8)
SWCLK: P3.1 R44.1 U4.20 | length 1092.6
  Top Layer w10: U4.20 P3.1 706.72,790 736.72,760 1231.07,760 1371.07,900 1516.54,900 R44.1
SWDIO: P3.3 U4.19 | length 270.6
  Top Layer w10: P3.3@425,790 445,790 560.43,905.43 U4.19
USART1_DE: U2.2 U2.3 U4.7 | length 945.5
  Top Layer w10: U4.7@874.34,1031.25 U4.7 926.61,1033.39 v1(945,1015) ; v1(1430,860) 1430,858.98 1425,853.98 1530,748.98 U2.3 U2.2
  Bottom Layer w10: v1(945,1015) 992.57,1015 1127.57,880 1315,880 1365,830 1397.43,830 1427.43,860 v1(1430,860)
USART1_RX: R7.1 U4.9 | length 814.3
  Top Layer w10: U4.9 924.57,1084.57 v1(945,1105) ; v1(1475,860) 1475,855 R7.1@1543.27,786.73
  Bottom Layer w10: v1(945,1105) 1140,910 1425,910 v1(1475,860)
USART1_TX: U2.4 U4.8 | length 827.9
  Top Layer w10: U4.8 943.98,1058.98 v1(945,1060) ; v1(1385,860) 1385,852.57 1480,757.57 U2.4
  Bottom Layer w10: v1(945,1060) 968.79,1060 1133.79,895 1350,895 v1(1385,860)
VSS: C1.2 C2.2 C3.2 C4.2 C5.2 C6.2 C7.2 C8.2 C9.2 C10.2 C11.1 C12.1 C13.1 C14.2 C15.1 C16.1 C17.1 C18.1 C19.2 D17.2 D18.2 D19.2 D20.2 D21.2 D22.2 D23.2 D24.2 D25.2 D26.2 D27.2 D28.2 D29.2 D30.2 D31.2 D32.2 D33.2 P2.19 P2.20 P3.2 P4.17 P5.2 Q1.2 R29.1 R31.1 R32.1 R34.1 R37.1 R38.1 U1.8 U2.5 U3.8 U4.1 U4.15 U5.8 U6.8 U7.4 U8.1 | length 4866.8
  Top Layer w10: v1(565,1025) 582.2,1007.8 U4.15 ; Q1.2 767.91,1478.19 767.91,1548.03 770,1550.12 ; U4.1 920.16,879.84 v1(925,875)
  Top Layer w20: D33.2 753.67,65.94 1083,65.94 1247.67,65.94 1329.53,65.94 D17.2 1395.47,65.47 1437.5,107.5 ; U5.8 375,1545.87 v1(375,1545) ; v1(410,1080) 431.54,1058.46 C7.2 422.6,1026.06 C6.2 ; C10.2 v1(533.46,1541.54) v1@535,1540 ; v1(565,1470) 605,1510 605,1550 605.12,1550.12 770,1550.12 929.88,1550.12 v1(930,1550) ; v1(1005,1630) 1005,1616.54 C3.2 ; U1.8 v1(1265,1555) ; 1403.03,175 1403.03,141.97 1437.5,107.5 ; 1467.17,40.77 1467.17,77.83 1437.5,107.5 ; U2.5 1480,415 1460,395 1460,130 1437.5,107.5 ; R38.1 R37.1 R34.1 R32.1 R31.1 R29.1 1723.46,1480
  Top Layer w30: U8.1@475.55,2637.87 483.42,2630 555,2630 680.24,2504.76 U7.4 ; C1.2 1031.54,1088.46 v1(1052.5,1067.5) 1073.46,1046.54 C9.2 C8.2 C4.2
  Bottom Layer w20: 250,2645 250,2162.11 385,2027.11 385,1915
  other v1: 305,825 625,2355 675,2355 725,2355 625,2400 675,2400 725,2400 675.24,2441.97 625,2445 725,2445 625,2490 725,2490 725,2535
pads on no net: FD2.3 U6.9

## Polygon pours and split planes (outlines as drawn)
VSS on Top Layer "Bottom Layer-No Net" (solid, remove dead copper, pour order 0): 0,2755.91 1259.84,2755.91 1259.84,2362.2 1771.65,2362.2 1771.65,0 0,0
VSS on Bottom Layer "Bottom Layer-No Net" (solid, remove dead copper, pour order 2): 0,2755.91 1259.84,2755.91 1259.84,2362.2 1771.65,2362.2 1771.65,0 0,0

## Keep-outs
Keep-Out Layer:
  the board outline again, w10

## Other copper
Top Layer:
  region net +3V3: 365,2620 365,2600 355,2590 270,2590 255,2575 255,2200 375,2080 515,2080 550,2115 550,2590 405,2590 395,2600 395,2620
Bottom Layer:
  rectangle net VSS: 595,2315 760,2560
  rectangle net VSS: 210,2600 290,2670
  rectangle net VSS: 200,2650 295,2690
  rectangle net VSS: 570,2280 795,2585
  region net +3V3: 270,2590 535,2590 550,2575 550,2115 515,2080 375,2080 270,2185

## Silkscreen, mask and mechanical layers (free items; w line width, h text height)
Top Overlay:
  text "16" at 155,2670 h40
  text "GND +12V" at 900,2380 h40 r90
  text "DE-260124" at 1630,1605 h30 r90
  text "16/32 RS485 RELAY EXPANDER" at 1750,1450 h28 r90
  text "JUBERA d.o.o. Sarajevo" at 1695,1445 h30 r90
  text "31" at 150,1160 h40
  text "GND" at 150,1060 h40
  text "S4 S3 S2 S1 S0 16/32" at 1615,915 h30 r90
  text "A RS485 B" at 1415,80 h30 r90

## Text inside footprints (layer, text, board x,y; h text height)
C14: Top Overlay "+" at 920.47,2316.5 h39.37 r270
C19: Top Overlay "+" at 1155.47,2316.5 h39.37 r270
P2: Top Overlay "2" at 1420,1025 h31.5; Top Overlay "1" at 1550,1025 h31.5; Top Overlay "19" at 1515,2095 h31.5; Top Overlay "20" at 1375,2095 h31.5